# EAGLE board fusion_xml_test (EAGLE 9.6.2)

No outline drawn. Coordinates in mm, seen from the top.
Copper layers used: 

## Placement (x,y rotation side)
B1  BATTERY_9V  [BATT]  0,0 0 top
R1  10k  [0805]  0,0 0 top
U1  ARDUINO_UNO  [UNO]  0,0 0 top

## Library data of the parts
B1 = power
R1 = resistor
U1 = arduino

## Nets
GND: B1.NEG R1.1 U1.GND
VCC: B1.POS U1.VIN